# Altium PCB E-26 Temp Sensor.PcbDoc
Units mil, origin at the board's own origin, x right, y up, seen from the top; angles counter-clockwise.
Board outline 646.31 x 926.5 mil, 2 copper layers (Top Layer, Bottom Layer); 8 components, 5 nets, 26 pads, 2 vias.
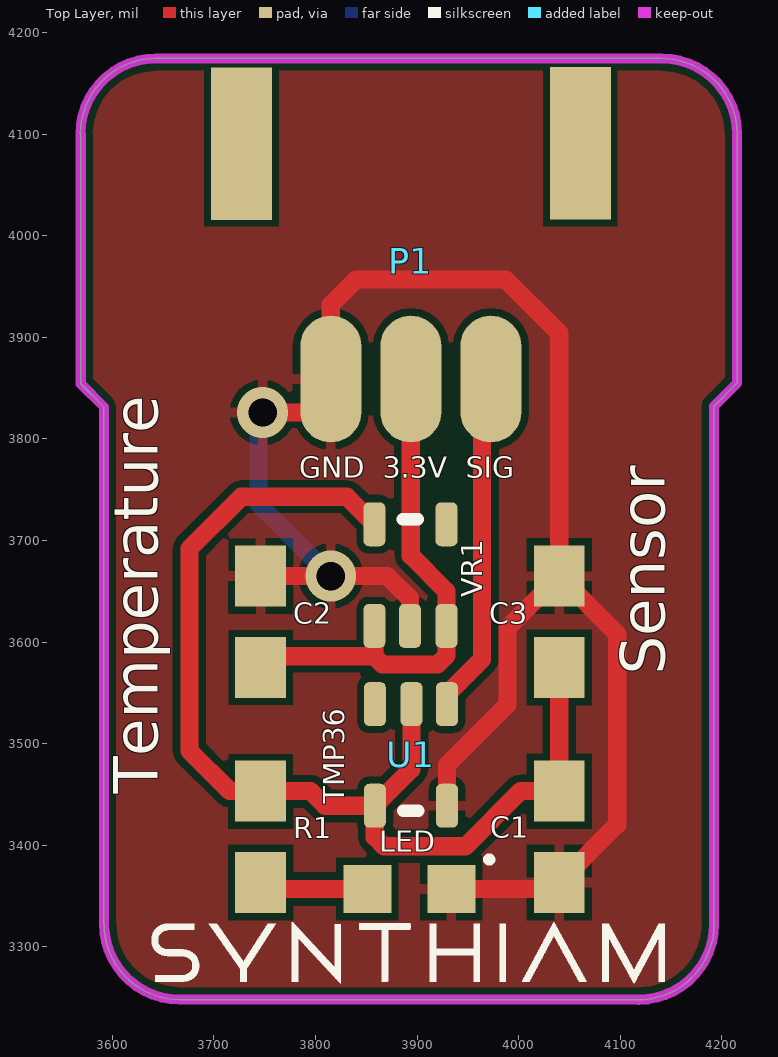
[diagram p0: Top Layer view]
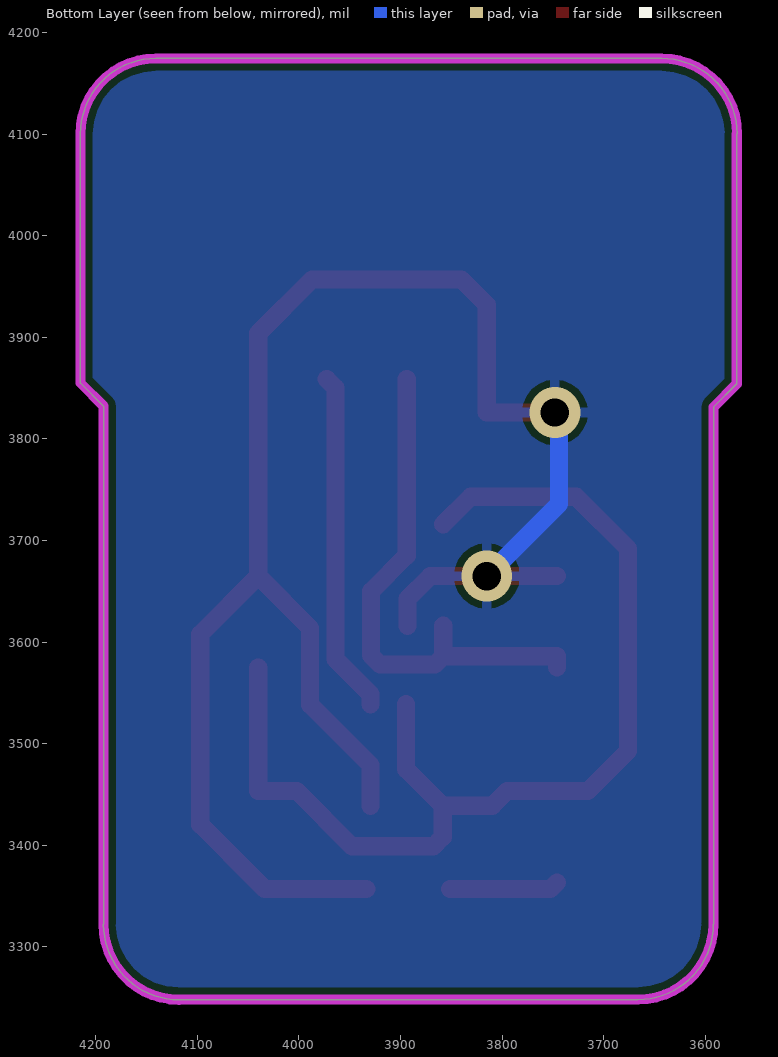
[diagram p1: Bottom Layer view, seen from below]

## Layer stack, top to bottom
Top Layer: signal copper 1.4
Dielectric: dielectric 12.6, FR-4, Dk 4.8
Bottom Layer: signal copper 1.4

## Board outline
3591.81,3831.5 3569,3854.31 3569,4100.19 3568.69,4100.19 cw(c3643,4100.19) 3643,4174.5 4140.69,4174.5 cw(c4140.69,4100.19) 4215,4100.19 4215,3855 4192.19,3832.19 4192.19,3322.31 4192.31,3322.31 cw(c4118,3322.31) 4118,3248 4118,3248.19 3666.31,3248.19 cw(c3666.31,3322.5) 3592,3322.5 3591.81,3322.5

## Design rules (kind name [scope] priority, off if disabled: settings)
Clearance [All] p1: gap=7
PolygonConnect [All] p1: connectstyle=Relief reliefconductorwidth=10 reliefentries=4 polygonreliefangle="90 Angle"
RoutingVias [All] p1: holewidth=28 width=50 viastyle="Through Hole" minholewidth=28 minwidth=50 maxholewidth=28 maxwidth=50
SilkscreenOverComponentPads [All] p1: minsilkscreentomaskgap=10
SolderMaskExpansion [All] p1: expansion=4
Width [All] p1: maxlimit=20 minlimit=7 preferedwidth=18 minimp=50.000000 maximp=50.000000 favimp=50.000000
27 further rules are at their usual default settings.

## Components (designator, comment, footprint, x,y, rotation, side; value= is the part's Value field where it differs from the comment)
C1 "18pF" "0805 TIGHT" 4040,3408.38 r90 top
C2 "2.2uF" "0805 TIGHT" 3746,3620 r90 top
C3 "100nF" "0805 TIGHT" 4040,3620 r90 top
LED "LED2" "0805 LED - TIGHT" 3920,3357 r0 top (schematic designator PWRLED)
P1 "JST 3-pin" "JST-PH 3-pin SMD" 3894,3975 r0 top
R1 "Res1" "0805 TIGHT" 3746,3408.38 r90 top
U1 "TMP36" SOT-23-5 3894,3489 r0 top
VR1 "3.3VREG" "SOT-25 New" 3893,3673 r180 top

## Footprints (in the part's own frame and the unit in brackets; to place one, negate y for a bottom-side part, rotate by r counter-clockwise, add the part's x,y. Pads: shape width x height; smd on the part's side, far side on the other; paste and mask are expansions set on the pad)
"0805 LED - TIGHT" [mm] "SMT LED; 2 Flat Leads; Lite-Oon LTST-C170CKT"
  rect 1.2x1.2 smd: 1(-1.75,0) 2(0.35,0)
  silkscreen extent 1.27,0.71 1.32,0.76
"0805 TIGHT" [mil]
  rect 60x50 smd: 1(-45,0) 2(45,0)
"JST-PH 3-pin SMD" [mil]
  rect 60x150 smd: 0(-166.71,115.62) 0(166.71,116.02)
  oval 60x125 smd: 1(-78.82,-116.02) 2(-0.08,-116.02) 3(78.66,-116.02)
SOT-23-5 [mm]
  rrect50% 0.55x1.1 smd: 1(0.902,1.27) 2(0.013,1.27) 3(-0.902,1.27) 4(-0.902,-1.27) 5(0.902,-1.27)
  silkscreen extent -0.19,-1.4 0.19,-1.4
"SOT-25 New" [mm]
  rrect50% 0.55x1.1 smd: 1(-0.914,-1.092) 2(0.889,-1.092) 3(0,1.448) 4(-0.914,1.448) 5(0.889,1.448)
  silkscreen extent -0.2,-1.22 0.18,-1.22

## Part data
C1 C2 C3: library part Cap, "Capacitor"
LED: library part LED1, "Typical RED GaAs LED"
P1: library part "Header 3", "Header, 3-Pin"
R1: "Resistor"
VR1: library part "Vreg SOT25"

## Free pads (board coordinates)
  round 225 on Bottom Solder: 0(3894,3492)

## Via types
v1: diameter 50, hole 28, Top Layer to Bottom Layer, tented both sides, 2 vias

## Nets (pads, with @x,y where several pads share a name; then routed paths per layer and width w, separated by ;. In a path a pad name is that pad's centre, name@x,y a point inside that pad or via, vN(x,y) a via of type N, cw(c..) or ccw(c..) an arc to the next point about the centre after c; other vN are vias at no path point)
GND: C1.1 C2.2 C3.2 LED.2 P1.1 U1.5 VR1.3 | length 1774.1
  Top Layer w18: C2.2 v1(3815,3665) 3871,3665 3871,3664.71 3893,3642.71 VR1.3 ; v1(3748,3826) 3815.18,3826 P1.1 3815.18,3932.18 3840,3957 3987,3957 4040,3904 C3.2 ; U1.5 3929.5,3479 3989,3538.5 3989,3614 C3.2 ; LED.2 4033.62,3357 C1.1 4097,3420.38 4097,3608 C3.2
  Bottom Layer w18: v1(3748,3826) 3744,3822 3744,3736 v1(3815,3665)
NetLED_1: LED.1 R1.1 | length 107.7
  Top Layer w18: R1.1 3752.38,3357 LED.1
SIG: P1.3 U1.1 | length 337.9
  Top Layer w18: U1.1 3929.5,3548.68 3964,3583.18 3964,3850.33 P1.3
VCC: C1.2 C3.1 R1.2 U1.2 U1.4 VR1.2 | length 1093.5
  Top Layer w18: VR1.2 3831,3743 3727,3743 3676,3692 3676,3493 3715.62,3453.38 R1.2 3795,3453.38 3809.38,3439 U1.4 ; U1.2 3894.5,3475 U1.4 ; C3.1 C1.2 4002,3453.38 3947.62,3399 3867.5,3399 3858.5,3408 U1.4
VIN: C2.1 P1.2 VR1.4 VR1.5 | length 517.6
  Top Layer w18: C2.1 3746,3586 3858,3586 ; VR1.5 3858,3586 ; P1.2 3893.92,3685.08 3929,3650 VR1.4 3929,3587 3920,3578 3866,3578 3858,3586
pads on no net: P1.0 U1.3 VR1.1

## Polygon pours and split planes (outlines as drawn)
GND on Top Layer "FillGnd5" (solid, pour order 4): 3591.81,3831.5 3569,3854.31 3569,4100.19 3568.69,4100.19 cw(c3643,4100.19) 3643,4174.5 4140.69,4174.5 cw(c4140.69,4100.19) 4215,4100.19 4215,3855 4192.19,3832.19 4189,3479 4186.77,3325.55 cw(c4112.45,3325.55) 4112.45,3251.23 4022,3253 3826,3253 3667.55,3250.23 cw(c3667.55,3324.55) 3593.23,3324.55 3591.81,3483
GND on Bottom Layer "FillGnd5" (solid, pour order 2): 3591.81,3831.5 3569,3854.31 3569,4100.19 3568.69,4100.19 cw(c3643,4100.19) 3643,4174.5 4140.69,4174.5 cw(c4140.69,4100.19) 4215,4100.19 4215,3855 4192.19,3832.19 4192.19,3484 4186.77,3323.55 cw(c4112.45,3323.55) 4112.45,3249.23 3914,3250 3670.55,3250.23 cw(c3670.55,3324.55) 3596.23,3324.55 3594,3459

## Keep-outs
Keep-Out Layer:
  lines w10: 3568.69,4100.19 cw(c3643,4100.19) 3643,4174.5 4140.69,4174.5 cw(c4140.69,4100.19) 4215,4100.19 4215,3855 4192.19,3832.19 4192.19,3322.31 ; 3569,4100.19 3569,3854.31 3591.81,3831.5 3591.81,3322.5 ; 3592,3322.5 ccw(c3666.31,3322.5) 3666.31,3248.19 4118,3248.19 ; 4118,3248 ccw(c4118,3322.31) 4192.31,3322.31

## Silkscreen, mask and mechanical layers (free items; w line width, h text height)
Top Overlay:
  drawing of 2260 lines, arcs and shapes, not listed
  text "GND" at 3784,3755 h35
  text "3.3V" at 3866,3755 h35
  text "SIG" at 3948,3755 h35
  text "Sensor" at 4158,3568 h75 r90
  text "Temperature" at 3659,3451 h75 r90
Bottom Solder:
  text ":)" at 3864,4106 h150 r270